# Altium PCB min_system.PcbDoc
Units mil, origin at the board's own origin, x right, y up, seen from the top; angles counter-clockwise.
Board outline 2100 x 900 mil, 4 copper layers (Top Layer, GND, Power, Bottom Layer), stack 23.756 mil thick; 33 components, 50 nets, 183 pads, 137 vias.
Unrouted connection lines stored in the file: 32.
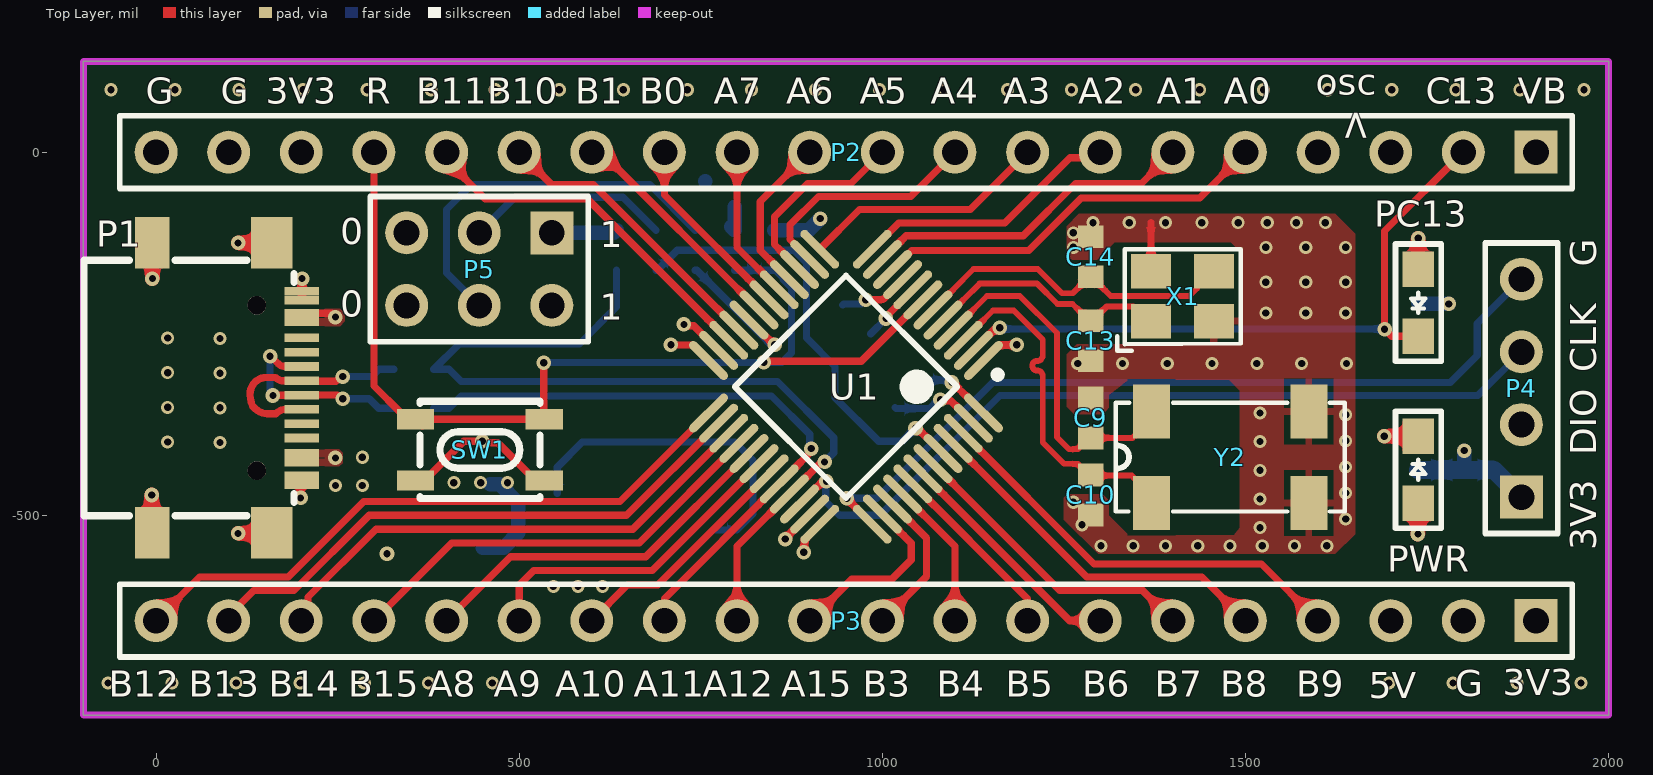
[diagram p0: Top Layer view]
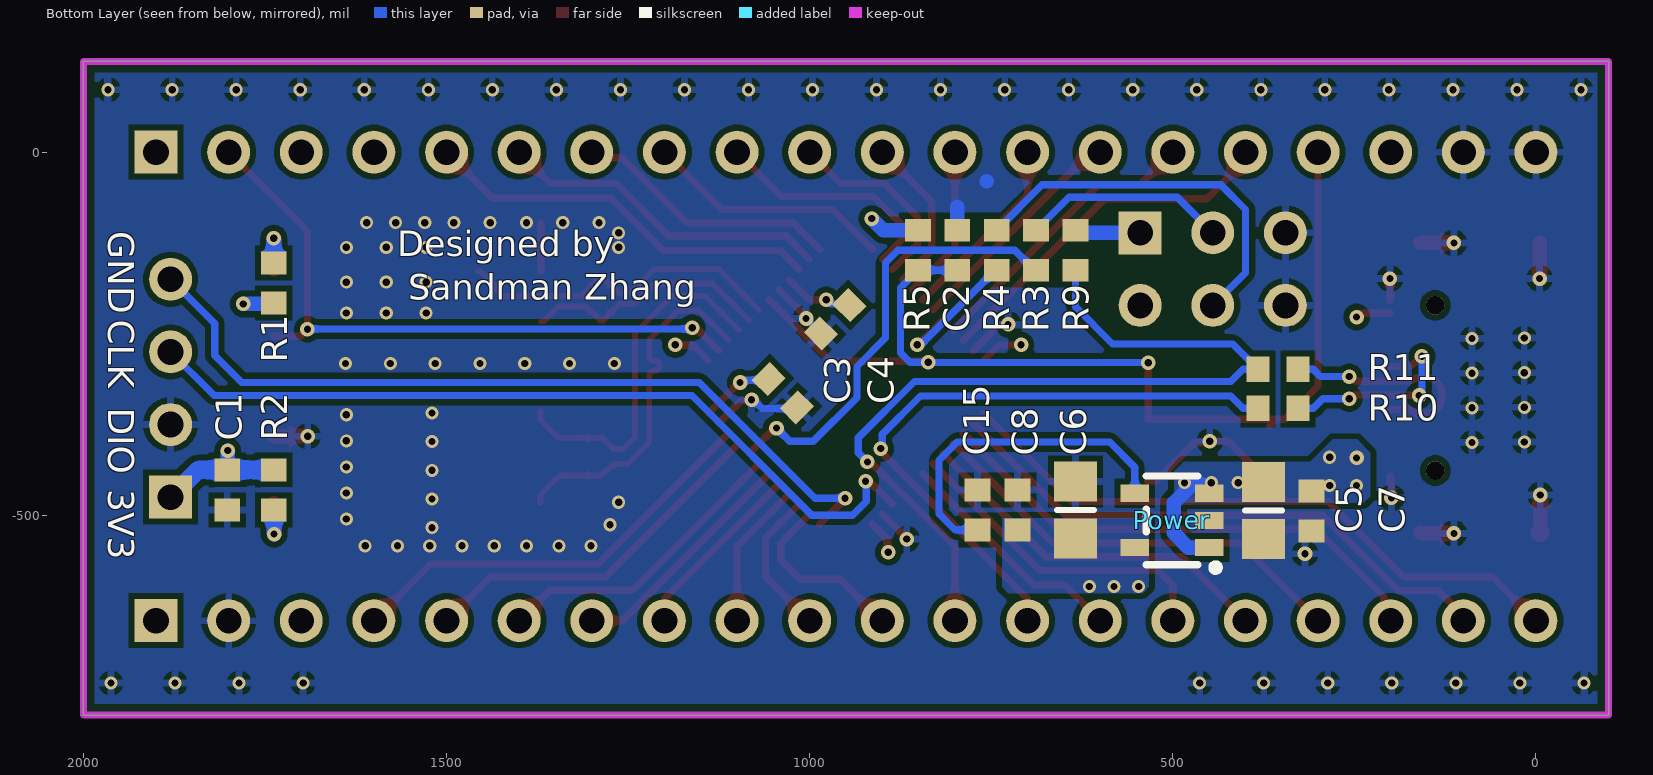
[diagram p1: Bottom Layer view, seen from below]
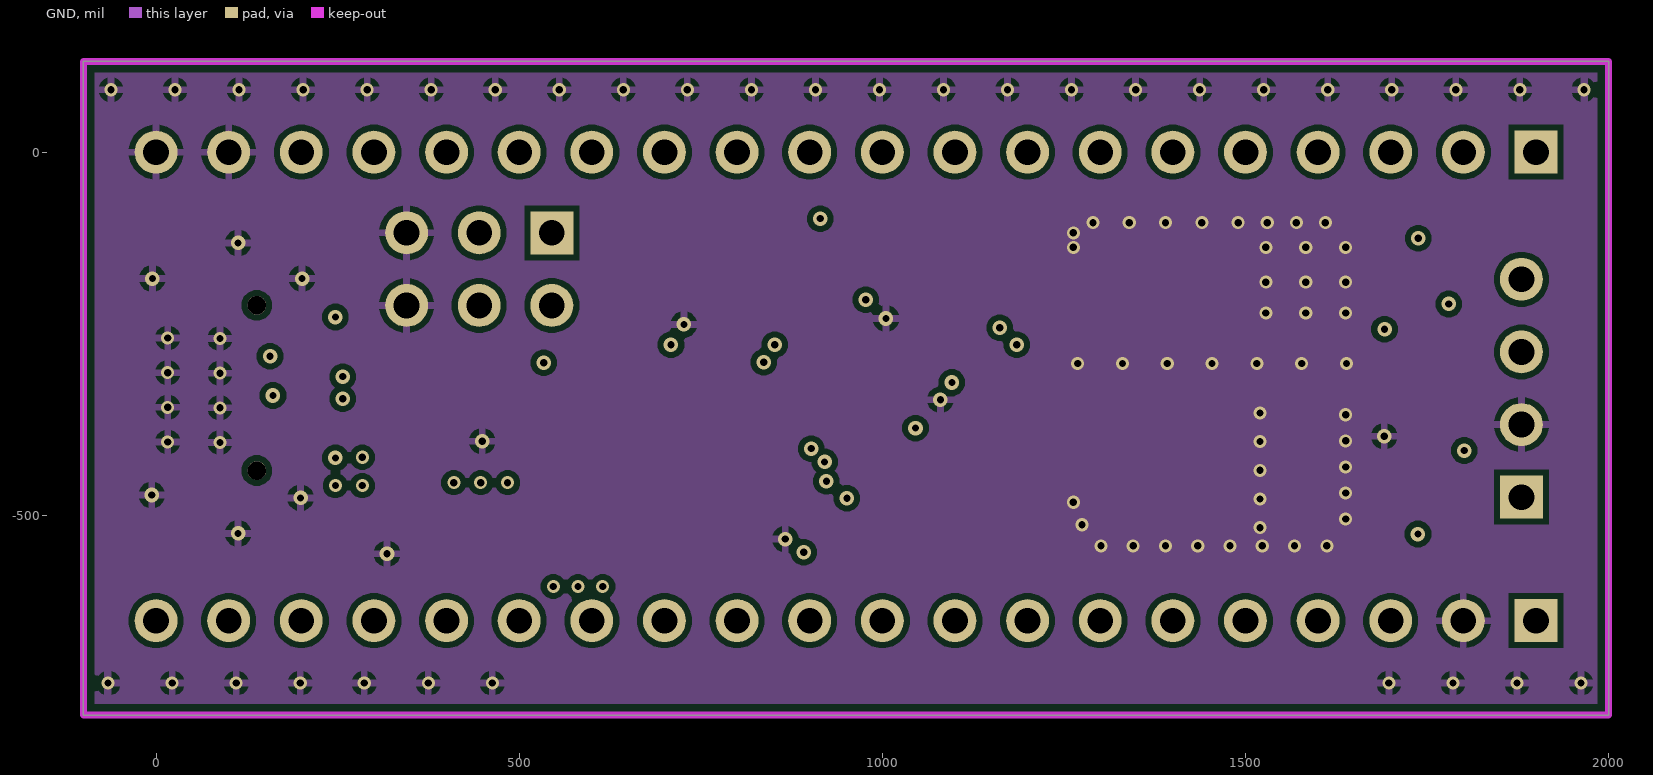
[diagram p2: GND]
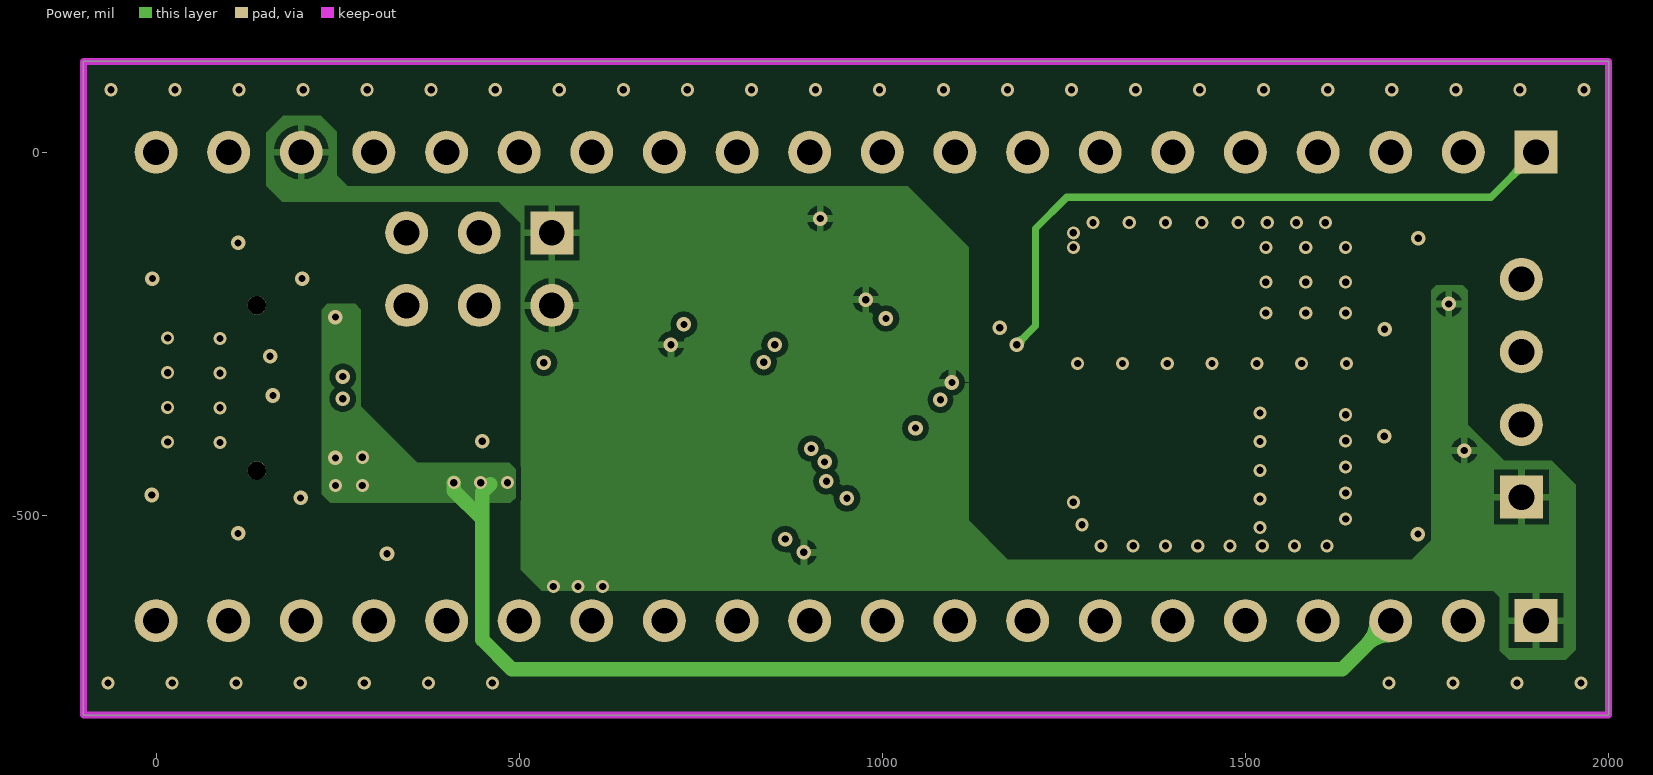
[diagram p3: Power]

## Layer stack, top to bottom
Top Solder: solder mask 0.4, Solder Resist, Dk 3.5
Top Layer: signal copper 1.4
Dielectric 2: prepreg 2.8, PP-006, Dk 4.1
GND: signal copper 1.378
Dielectric 1: dielectric 12.6, FR-4, Dk 4.8
Power: signal copper 1.378
Dielectric 3: prepreg 2.8, PP-006, Dk 4.1
Bottom Layer: signal copper 1.4
Bottom Solder: solder mask 0.4, Solder Resist, Dk 3.5

## Board outline
-100,-775 2000,-775 2000,125 -100,125

## Design rules (kind name [scope] priority, off if disabled: settings)
BoardOutlineClearance [All] p1: gap=15 ignorepadtopadclearanceinfootprint=FALSE
Clearance [All] p1: gap=8 ignorepadtopadclearanceinfootprint=TRUE
ComponentOrientations [All] p1: allowedrotations=1
DiffPairsRouting [All] p1: maxlimit=20 minlimit=8 mostfreqgap=10 toplayer_minwidth=6 toplayer_maxwidth=20 toplayer_prefwidth=10 midlayer1_maxgap=10 midlayer1_minwidth=6 midlayer1_maxwidth=20 midlayer1_prefwidth=10 midlayer2_maxgap=10 midlayer2_minwidth=6 midlayer2_maxwidth=20 midlayer2_prefwidth=10 bottomlayer_maxgap=10 bottomlayer_minwidth=6 bottomlayer_maxwidth=20 bottomlayer_prefwidth=10 maxuncoupledlength=500
HoleSize [All] p1: absolutevalues=TRUE maxlimit=100 minlimit=10 maxpercent=80.000 minpercent=20.000
HoleToHoleClearance [All] p1: gap=8 allowstackedmicrovias=TRUE
MinimumSolderMaskSliver [All] p1: minsoldermaskwidth=8
NetsToIgnore [All] p1:
PermittedLayers [All] p1: toplayerpermitted=TRUE bottomlayerpermitted=TRUE
PlaneConnect PlaneConnect_GND [InNet('GND')] p1: planeconnectstyle=Relief reliefexpansion=20 reliefentries=4 reliefconductorwidth=10 reliefairgap=8
PlaneConnect [All] p2: planeconnectstyle=Direct reliefexpansion=20 reliefentries=4 reliefconductorwidth=15 reliefairgap=10
PolygonConnect PolygonConnect_GND [All] p1: connectstyle=Relief reliefconductorwidth=10 reliefentries=4 polygonreliefangle="90 Angle" airgapwidth=8
PolygonConnect [All] p2: connectstyle=Direct reliefconductorwidth=15 reliefentries=4 polygonreliefangle="90 Angle" airgapwidth=10
RoutingVias [All] p1: holewidth=10 width=20 viastyle="Through Hole" minholewidth=8 minwidth=16 maxholewidth=16 maxwidth=32
SilkToSilkClearance [All] p1: silktosilkclearance=0
SilkToSolderMaskClearance [IsPad] p1: minsilkscreentomaskgap=0 clearancetoexposedcopper=TRUE
SolderMaskExpansion [All] p1: expansion=4 istentingtop=TRUE
UnRoutedNet [All] p1: checkbadconnections=TRUE
Width Width_GND [InNet('GND')] p1: maxlimit=50 minlimit=10 preferedwidth=20
Width Width_5V [InNet('+5')] p2: maxlimit=80 minlimit=10 preferedwidth=20
Width Width_3V3 [InNet('3V3')] p3: maxlimit=80 minlimit=10 preferedwidth=20
Width [All] p4: maxlimit=40 minlimit=8 preferedwidth=10
22 further rules are at their usual default settings.

## Classes and differential pairs
differential pair USBD: +USBD_P -USBD_N
differential pair OSC32: +OSC32_P -OSC32_N
differential pair OSC: +OSC_P -OSC_N
differential pair D: +D_P -D_N

## Components (designator, comment, footprint, x,y, rotation, side; value= is the part's Value field where it differs from the comment)
C1 "100nF" 1608[0603] 1802,-465 r90 bottom value=100pF
C2 "100nF" 1608[0603] 796.75,-135 r270 bottom value=100pF
C3 "100nF" 1608[0603] 1037,-332 r45 bottom value=100pF
C4 "100nF" 1608[0603] 965,-230 r135 bottom value=100pF
C5 "1uF" 6-0805_M 375,-493.37 r90 bottom value=100pF
C6 "1uF" 6-0805_M 634,-492.63 r270 bottom value=100pF
C7 "100nF" 1608[0603] 309,-494 r90 bottom value=100pF
C8 "100nF" 1608[0603] 714,-492.56 r270 bottom value=100pF
C9 "Cap" 1608[0603] 1287,-365.83 r90 top value=100pF
C10 "Cap" 1608[0603] 1287,-472 r90 top value=100pF
C13 "Cap" 1608[0603] 1287,-259.67 r270 top value=100pF
C14 "Cap" 1608[0603] 1287,-144 r270 top value=100pF
C15 "22nF" 1608[0603] 769,-492.56 r90 bottom value=100pF
P1 "USB-C 16P" "USB-C 16P" -5,-125 r270 top locked
P2 "Header 20" HDR1X20 1900,0 r180 top locked
P3 "Header 20" HDR1X20 1900,-645 r180 top locked
P4 "Header 4" HDR1X4 1880,-475 r90 top
P5 "Header 3X2" HDR2X3 545,-111 r180 top
PC13 "LED" LED_0603 1738,-161 r270 top
Power "ME6211" ME6211 501.18,-507 r180 bottom
PWR "LED" LED_0603 1738,-483.52 r90 top
R1 "Res" 1608[0603] 1738,-180 r90 bottom
R2 "Res" 1608[0603] 1738,-465 r270 bottom
R3 "100k" 1608[0603] 688.25,-135 r90 bottom
R4 "100k" 1608[0603] 742.5,-135 r270 bottom
R5 "Res" 1608[0603] 851,-135 r90 bottom
R9 "10K" 1608[0603] 634,-135 r270 bottom
R10 "22R" 1608[0603] 355,-352.67 r0 bottom
R11 "22R" 1608[0603] 355,-299 r0 bottom
SW1 "TS-1089S-AR02516" BUTTON-SMD_4P 446,-410 r0 top
U1 "STM32F103C8T6" STM-LQFP48_N 950,-323 r225 top locked
X1 "XTAL_8MHz" XTAL_3225 1333.61,-264.54 r0 top
Y2 "XTAL_32.768" MC-306 1479,-420 r0 top

## Footprints (in the part's own frame and the unit in brackets; to place one, negate y for a bottom-side part, rotate by r counter-clockwise, add the part's x,y. Pads: shape width x height; smd on the part's side, far side on the other; paste and mask are expansions set on the pad)
6-0805_M [mm] "Chip Resistor, Body 2.0x1.2mm, IPC Low Density"
  rect 1.4x1.5 smd: 1(-1,0) 2(1,0)
  silkscreen extent 0,-0.65 0,0.65, body extent -1.07,-0.7 1.07,0.7, height 0.7
1608[0603] [mm] "Chip Capacitor, Body 1.6x0.8mm, IPC High Density"
  rect 0.8x0.9 smd: 1(-0.7,0) 2(0.7,0)
  body extent -0.87,-0.48 0.87,0.48, height 1.3
BUTTON-SMD_4P [mil] "SMD_4P - L4.2-W3.3-P2.15-LS5.1"
  rect 51.2x27.6 smd mask+2: 1(-88.6,42.3) 2(88.6,42.3) 3(-88.6,-42.3) 4(88.6,-42.3)
  silkscreen extent -83,-67 83,67
HDR1X4 [mm] "Connector; Header; 4 Position"
  rect 1.5x1.5 hole 0.9: 1(0,0)
  round 1.5 hole 0.9: 2(2.54,0) 3(5.08,0) 4(7.62,0)
  silkscreen extent -1.27,-1.27 8.89,1.27
HDR1X20 [mm] "Connector; Header; 20 Position"
  rect 1.5x1.5 hole 0.9: 1(0,0)
  round 1.5 hole 0.9: 2(2.54,0) 3(5.08,0) 4(7.62,0) 5(10.16,0) 6(12.7,0) 7(15.24,0) 8(17.78,0) 9(20.32,0) 10(22.86,0) 11(25.4,0) 12(27.94,0) 13(30.48,0) 14(33.02,0) 15(35.56,0) 16(38.1,0) 17(40.64,0) 18(43.18,0) 19(45.72,0) 20(48.26,0)
  silkscreen extent -1.27,-1.27 49.53,1.27
HDR2X3 [mm] "Connector; Header; 3x2 Position"
  rect 1.5x1.5 hole 0.9: 1(0,0)
  round 1.5 hole 0.9: 2(0,2.54) 3(2.54,0) 4(2.54,2.54) 5(5.08,0) 6(5.08,2.54)
  silkscreen extent -1.27,-1.27 6.35,3.81
LED_0603 [mil]
  rect 49x43 smd: 1(0,0) 2(92.52,0)
  silkscreen extent -34,-31 127,31
MC-306 [mm]
  rect 1.3x1.9 smd: 1(-2.75,-1.6) 2(2.75,-1.6) 3(2.75,1.6) 4(-2.75,1.6)
  silkscreen extent -4,-1.9 4,1.9
ME6211 [mm] "SOT23-5"
  rect 1x0.6 smd: 1(1.3,-0.95) 2(1.3,0) 3(1.3,0.95) 4(-1.3,0.95) 5(-1.3,-0.95)
  silkscreen extent -0.9,-1.78 1.65,1.55
STM-LQFP48_N [mm] "QFP, 48-Leads, Body 7x7mm, Pitch 0.5mm, IPC Medium Density"
  oval 1.8x0.3 smd: 1(-4.05,2.75) 2(-4.05,2.25) 3(-4.05,1.75) 4(-4.05,1.25) 5(-4.05,0.75) 6(-4.05,0.25) 7(-4.05,-0.25) 8(-4.05,-0.75) 9(-4.05,-1.25) 10(-4.05,-1.75) 11(-4.05,-2.25) 12(-4.05,-2.75) 25(4.05,-2.75) 26(4.05,-2.25) 27(4.05,-1.75) 28(4.05,-1.25) 29(4.05,-0.75) 30(4.05,-0.25) 31(4.05,0.25) 32(4.05,0.75) 33(4.05,1.25) 34(4.05,1.75) 35(4.05,2.25) 36(4.05,2.75)
  oval 0.3x1.8 smd: 13(-2.75,-4.05) 14(-2.25,-4.05) 15(-1.75,-4.05) 16(-1.25,-4.05) 17(-0.75,-4.05) 18(-0.25,-4.05) 19(0.25,-4.05) 20(0.75,-4.05) 21(1.25,-4.05) 22(1.75,-4.05) 23(2.25,-4.05) 24(2.75,-4.05) 37(2.75,4.05) 38(2.25,4.05) 39(1.75,4.05) 40(1.25,4.05) 41(0.75,4.05) 42(0.25,4.05) 43(-0.25,4.05) 44(-0.75,4.05) 45(-1.25,4.05) 46(-1.75,4.05) 47(-2.25,4.05) 48(-2.75,4.05)
  silkscreen extent -4.17,-2.75 2.75,3.57, body extent -3.5,-3.5 3.5,3.5, height 1.6
"USB-C 16P" [mm]
  rect 1.8x1.45 smd: 0(0,4.18) 0(10.14,4.18)
  rect 1.8x1.2 smd: 0(0,0) 0(10.14,0)
  rect 0.3x1.2 smd: A1(1.999,5.22) A4(2.761,5.22) A5(3.82,5.22) A6(4.82,5.22) A7(5.32,5.22) A8(6.32,5.22) A9(7.361,5.22) A12(8.149,5.22) B1(8.454,5.22) B4(7.666,5.22) B5(6.82,5.22) B6(5.82,5.22) B7(4.32,5.22) B8(3.32,5.22) B9(2.456,5.22) B12(1.694,5.22)
  round 0.65 hole 0.65 unplated: ""(2.18,3.65) ""(7.96,3.65)
  silkscreen extent 0.6,-2.4 9.54,4.95
XTAL_3225 [mm]
  rect 1.4x1.2 smd mask+0.051: 1(0.929,0.804) 2(3.13,0.804) 3(3.13,2.554) 4(0.929,2.554)
  silkscreen extent -0.26,-0.23 4.06,3.33, body extent 0,0 4.06,3.3, height 0.7

## Part data
C1 C2 C3 C4 C5 C6 C7 C8 C15: library part Cap, "Capacitor", LatestRevisionDate=17-Jul-2002, LatestRevisionNote="Re-released for DXP Platform.", PackageDescription="Radial Cap, Thru-Hole; 2 Leads; 0.3 in Pin Spacing", PackageReference=RAD-0.3, Published=8-Jun-2000, Publisher="Altium Limited"
C9 C10 C13 C14: "Capacitor", LatestRevisionDate=17-Jul-2002, LatestRevisionNote="Re-released for DXP Platform.", PackageDescription="Radial Cap, Thru-Hole; 2 Leads; 0.3 in Pin Spacing", PackageReference=RAD-0.3, Published=8-Jun-2000, Publisher="Altium Limited"
P2 P3: "Header, 20-Pin", LatestRevisionDate=17-Jul-2002, LatestRevisionNote="Re-released for DXP Platform.", Publisher="Altium Limited"
P4: "Header, 4-Pin", LatestRevisionDate=17-Jul-2002, LatestRevisionNote="Re-released for DXP Platform.", Publisher="Altium Limited"
P5: "Header, 3-Pin, Dual row", LatestRevisionDate=17-Jul-2002, LatestRevisionNote="Re-released for DXP Platform.", Publisher="Altium Limited"
PC13 PWR: "Typical INFRARED GaAs LED", LatestRevisionDate=08-Jul-2005, LatestRevisionNote="Mech Layer 1 removed.", PackageDescription="LED; 2 Leads", PackageReference=LED-0, Published=8-Jun-2000, Publisher="Altium Limited"
Power: "SOT23-5"
R1 R2 R5: "Resistor", LatestRevisionDate=17-Jul-2002, LatestRevisionNote="Re-released for DXP Platform.", PackageDescription="Axial Device, Thru-Hole; 2 Leads; 0.4 in Pin Spacing", PackageReference=AXIAL-0.4, Published=8-Jun-2000, Publisher="Altium Limited"
R3 R4 R9 R10 R11: library part Res, "Resistor", LatestRevisionDate=17-Jul-2002, LatestRevisionNote="Re-released for DXP Platform.", PackageDescription="Axial Device, Thru-Hole; 2 Leads; 0.4 in Pin Spacing", PackageReference=AXIAL-0.4, Published=8-Jun-2000, Publisher="Altium Limited"
SW1: library part Button-SMD_4P, "SMD_4P-L4.2-W3.3-P2.15-LS5.1", Actuator/Cap Color=白色, Contact Current=50mA, Insulation Resistance=100MΩ, JLCPCB Part Class="Extended Part", LCSC Part Name="3×4×2.5 160gf 轻触开关", Manufacturer=XUNPU(讯普), Operating Force=160gf@±50gf, Operating Temperature=-30℃~+80℃, Voltage Rating (DC)=12V, Actuator Style=椭圆形按钮, Add into BOM=yes, Circuit=单刀单掷, Convert to PCB=yes, Datasheet=https://atta.szlcsc.com/upload/public/pdf/source/20200810/C720479_389650BB8B865DD3822BD59B78D6CF64.pdf, Device=TS-1089S-AR02516, Manufacturer Part=TS-1089S-AR02516, Mechanical Life=100000, Mounting Style=立贴, Name=TS-1089S-AR02516, Pin Style=SMD接片, Strike Gundam=否, Supplier=LCSC, Supplier Footprint=SMD, Supplier Part=C720479, Switch Height=2.5mm, Switch Length=4.2mm, Switch Width=3.25mm, Symbol=TS-1089S-AR02516
U1: "ARM Cortex-M3 32-bit MCU, 64 KB Flash, 20 KB Internal RAM, 37 I/Os, 48-pin LQFP, -40 to 85 degC, Tray", I/Os (High Current)=37, Operating Frequency(F) (Processor speed) (MHz)=72, Supplier Part Number 1=497-6063-ND, Supply Voltage(Vcc) min (V)=2, A/D Converter="2x12-bit (10 Channel)", ComponentLink1Description="Manufacturer URL", ComponentLink1URL=http://www.st.com/web/en/home.html, ComponentLink2Description=Datasheet, ComponentLink2URL=http://www.st.com/st-web-ui/static/active/en/resource/technical/document/datasheet/CD00161566.pdf, ComponentLink3Description="Package Specification", ComponentLink3URL=http://www.st.com/st-web-ui/static/active/en/resource/technical/document/datasheet/DM00058181.pdf, Core="ARM Cortex-M3", DatasheetVersion="Rev. 16", FLASH Size (Prog) (kB)=64, Internal RAM Size (kB)=20, Mounting Technology="Surface Mount", PackageDescription="48-Pin Low Profile Quad Flat Package, 7 x 7 mm Body, 0.5 mm Pitch", PackageReference=LQFP48, PackageVersion="Rev. 6, 06/2013", Packing=Tray, PartNumber=STM32F103C8T6, Supplier 1=Digi-Key, Supplier 2=Farnell, Supplier 3=Newark, Supplier 4=Newark, Supplier 5=Mouser, Supplier Part Number 2=1447637, Supplier Part Number 3=59M2182, Supplier Part Number 4=57P1222, Supplier Part Number 5=511-STM32F103C8T6
X1: library part XTAL_3225
Y2: "32.768kHz", LatestRevisionDate=17-Jul-2002, LatestRevisionNote="Re-released for DXP Platform.", PackageDescription="Crystal, Thru-Hole; 2 Leads; Body 3.1 x 8.2 mm (Dia.xH)", PackageReference=R38, Published=8-Jun-2000, Publisher="Altium Limited"

## Via types
v1: diameter 18, hole 10, Top Layer to Bottom Layer, tented both sides, 98 vias
v2: diameter 20, hole 10, Top Layer to Bottom Layer, tented both sides, 39 vias

## Nets (pads, with @x,y where several pads share a name; then routed paths per layer and width w, separated by ;. In a path a pad name is that pad's centre, name@x,y a point inside that pad or via, vN(x,y) a via of type N, cw(c..) or ccw(c..) an arc to the next point about the centre after c; other vN are vias at no path point)
3V3: C1.2 C3.2 C4.2 C6.2 C8.2 P2.18 P3.1 P4.1 P5.1 P5.2 Power.5 R1.1 R2.1 R5.2 R9.1 U1.9 U1.24 U1.36 U1.48 | length 695.2
  Top Layer w10: v2(709,-265) 709.58,-265.58 739.47,-265.58 U1.24 ; v2(892,-551) 892.58,-550.42 892.58,-533.53 U1.36 ; v2(977.29,-203) 998.17,-203 ccw(c998.17,-196.17) 1002.99,-201.01 1027.53,-176.47 ccw(c1026.5,-175.45) U1.9 ; v2(1095.82,-317.1) 1096.73,-317.1 1138.81,-359.19 U1.48
  Bottom Layer w10: C4.2 946.9,-209.12 971.17,-209.12 v2(977.29,-203) ; C3.2 1057.88,-313.9 1089.91,-313.9 1093.11,-317.1 v2(1095.82,-317.1)
  Bottom Layer w20: P5.1 630.44,-111 R9.1 ; R5.2 898.44,-107.44 v2(914.44,-91.44) ; R1.1 1739.44,-209 v2(1780,-209) ; v2(1801.41,-410.79) 1801.41,-431.69 1802,-432.28 C1.2
  Bottom Layer w25: R2.1 C1.2 1842.44,-437.44 P4.1
  other v1: 547,-598 581,-598 615,-598
+5: C5.2 C7.2 P1.A4 P1.A9 P1.B4 P1.B9 P3.3 Power.1 Power.3 | length 1777.3
  Top Layer w10: P1.B9 241.71,-221.71 v2(247,-227)
  Power w20: v1(410,-455) 410,-466 449,-505 ; 460,-457 449,-468 449,-505 ; P3.3 1633,-712 490,-712 449,-671 449,-505
  Bottom Layer w20: Power.1 478.6,-544.4 499,-524 499,-483 473,-457 460,-457
  other v1: 247,-459 284,-459 447,-455 484,-455 284,-420
  other v2: 247,-421
BOOT0: R3.1 U1.44 | length 623.5
  Top Layer w10: v2(1045.68,-379.88) 1048.15,-379.88 1083.14,-414.87 U1.44
  Bottom Layer w10: R3.1 690.22,-162.56 717.78,-135 878.36,-135 895.56,-152.21 895.56,-255.56 935,-295 935,-338 995,-398 1027.56,-398 v2(1045.68,-379.88)
BOOT1: R4.2 U1.20 | length 201.6
  Top Layer w10: U1.20 816.86,-231.13 850.73,-265 v2(852,-265)
  Bottom Layer w10: R4.2 744.47,-162.56 844.99,-263.09 850.09,-263.09 v2(852,-265)
D_N: P3.13 R10.2 U1.32 | length 928.8
  Top Layer w10: P3.13 700,-614.76 U1.32 ; 886.72,-428.04 U1.32 ; v2(902.15,-408.15) 903.27,-409.27 903.27,-411.27 858.13,-456.4 U1.32
  Bottom Layer w10: R10.2 403.31,-352.67 420.14,-335.83 847.55,-335.83 900.23,-388.52 900.23,-406.23 v2(902.15,-408.15)
D_P: P3.12 R9.2 R11.2 U1.33 | length 1237.5
  Top Layer w10: P3.12 800,-542.6 U1.33 872.27,-470.55 917.41,-425.41 919.41,-425.41 v2(920.53,-426.53)
  Bottom Layer w10: R9.2 634,-213 583,-264 417.56,-264 R11.2 403.31,-299 420.14,-315.83 855.83,-315.83 933,-393 933,-413.76 920.53,-426.23 v2(920.53,-426.53)
GND: C1.1 C2.1 C3.1 C4.1 C5.1 C6.1 C7.1 C8.1 C9.2 C10.1 C13.2 C14.1 C15.2 P1.0 P1.A1 P1.A12 P1.B1 P1.B12 P2.19 P2.20 P3.2 P4.2 P5.5 P5.6 Power.2 PWR.2 SW1.3 SW1.4 U1.8 U1.23 U1.35 U1.47 X1.2 X1.4 Y2.2 Y2.3 | length 953.8
  Top Layer w10: v2(199,-476) 199,-459.33 cw(c200.51,-459.33) P1.B1 P1.A12 ; P1.A1 P1.B12 201,-191.71 v2(201,-174) ; SW1.3 369.2,-452.3 423.5,-398 v2(449,-398) 450.91,-399.91 470.41,-399.91 522.8,-452.3 SW1.4 ; v2(726.79,-237.18) 728.7,-239.09 740.33,-239.09 774.13,-272.89 U1.23 ; v2(866.24,-532.71) 866.24,-532.04 U1.35 ; v2(1005,-229) 1005,-226.73 1041.87,-189.86 U1.8 ; v2(1080,-341) 1081.29,-342.29 1094.07,-342.29 1124.49,-372.7 U1.47@1125.38,-372.7 ; 1370,-97 1370,-163.8 X1.4
  Top Layer w20: P1.0@-6,-523.21 v2(-6,-472) ; v2(-5,-174) P1.0@-5,-125 ; v2(113,-525) 158.78,-525 P1.0@159.57,-524.21 ; v2(113,-125) P1.0@159.57,-125 ; v2(1691,-391) PWR.2
  Top Layer w25: P1.0@-6,-523.21 ccw(c-5,-523.21) P1.0@-5,-524.21
  Bottom Layer w10: C4.1@984,-250 v2(1005,-229) ; C3.1 1018.9,-352.88 1065.41,-352.88 1077.29,-341 v2(1080,-341)
  Bottom Layer w20: C2.1@792.15,-102.84 C2.1 796.75,-75.25 797,-75
  other v1: -66,-731 22.18,-731 110.35,-731 198.52,-731 286.7,-731 374.87,-731 463.05,-731 1697.48,-731 1785.65,-731 1873.83,-731 1962,-731 1301,-542 1345.43,-542 1389.86,-542 1434.29,-542 1478.71,-542 1523.14,-542 1567.57,-542 1612,-542 1520,-517 1275,-513 1638,-505.1 1263,-482 1520,-477.5 1638,-469.2 1520,-438 1638,-433.3 88,-399.72 16,-399 1520,-398.5 1638,-397.4 1638,-361.5 1520,-359 88,-352 16,-351.28 16,-303.55 88,-304.28 1269,-291 1330.67,-291 1392.33,-291 1454,-291 1515.67,-291 1577.33,-291 1639,-291 88,-256.55 16,-255.83 1528,-221.47 1583,-221.47 1638,-221.47 1528,-178.93 1583,-178.93 1638,-178.93 1263,-131 1528,-131 1583,-131 1638,-131 1263,-111 1290,-97 1340,-97 1390,-97 1440,-97 1490,-97 1530,-97 1570,-97 1610,-97 -62,86 26.17,86 114.35,86 202.52,86 290.7,86 378.87,86 467.04,86 555.22,86 643.39,86 731.56,86 819.74,86 907.91,86 996.09,86 1084.26,86 1172.43,86 1260.61,86 1348.78,86 1436.95,86 1525.13,86 1613.3,86 1701.48,86 1789.65,86 1877.82,86 1966,86
  other v2: 318,-553
NetC15_1: C15.1 Power.4 | length 466.5
  Bottom Layer w10: Power.4 552.36,-433.64 587,-399 797,-399 822,-424 822,-498 799.88,-520.12 C15.1
NetP5_3: P5.3 R3.2 | length 282.4
  Bottom Layer w10: P5.3 494,-62 642.81,-62 R3.2
NetP5_4: P5.4 R4.1 | length 533.1
  Bottom Layer w10: P5.4 400,-166 400,-79 434,-45 680.06,-45 R4.1
NetPC13_1: PC13.1 R1.2 | length 76.9
  Top Layer w20: v2(1737.86,-118.32) 1737.86,-160.86 PC13.1
  Bottom Layer w20: v2(1737.86,-118.32) 1737.86,-152.3 R1.2
NetPWR_1: PWR.1 R2.2 | length 75.8
  Top Layer w20: v2(1737.55,-525.74) 1737.55,-483.97 PWR.1
  Bottom Layer w20: v2(1737.55,-525.74) 1737.55,-493.01 R2.2
NRST: C2.2 P2.17 R5.1 SW1.1 SW1.2 U1.7 | length 1447.1
  Top Layer w10: P2.17 300,-321.81 336.8,-358.61 336.8,-358.9 345.6,-367.7 SW1.1 ; SW1.1@366.61,-376.91 SW1.1 ; v2(534,-290) 534,-367.1 SW1.2 SW1.1 ; v2(836.57,-289.33) 837.9,-288 971.08,-288 U1.7
  Bottom Layer w10: v2(534,-290) 534.33,-289.67 836.24,-289.67 v2(836.57,-289.33) 861.84,-289.33 875,-276.17 875,-186.56 863.72,-175.28 863.72,-173.31 852.97,-162.56 C2.2
OSC32_N: C9.1 U1.4 Y2.4 | length 492.5
  Top Layer w8: U1.4@1097.32,-244.83 1144.15,-198 1189.28,-198 1240.36,-249.07 1240.36,-392.36 1256.92,-408.92 1269.51,-408.92 1285.03,-393.39 1344.46,-393.39 1347.44,-390.41 1349.14,-390.41 1370.73,-368.82 Y2.4
OSC32_P: C10.2 U1.3 Y2.1 | length 492.5
  Top Layer w8: U1.3 1152.44,-218 1181,-218 1221,-258 1221,-262.52 1221,-279.52 cw(c1213,-279.52) 1213,-287.52 ; 1212.96,-300.52 cw(c1212.96,-294.02) 1212.96,-287.52 ; 1213,-300.52 cw(c1213,-308.52) 1221,-308.52 1221,-368.64 1221,-399.64 1250.27,-428.92 1269.51,-428.92 1279.56,-438.97 1281.53,-438.97 1287.8,-445.24 1343.38,-445.24 1347.73,-449.59 1349.14,-449.59 1370.73,-471.18 Y2.1
OSC_N: C14.2 U1.6 X1.3 | length 461.7
  Top Layer w8: U1.6 1098.3,-188.62 1098.3,-188.4 1125.71,-160.99 1213.99,-160.99 1247.27,-194.27 1262.32,-194.27 1285.03,-171.56 1288.97,-171.56 1300.72,-183.31 1300.72,-184.32 1314.4,-198 1422.82,-198 1433.26,-187.56 1433.26,-183.62 1452.89,-164 X1.3
OSC_P: C13.1 U1.5 X1.1 | length 347.2
  Top Layer w8: U1.5 1112.22,-202.54 1112.44,-202.54 1133.99,-180.99 1213.17,-180.99 1241.18,-209 1261.92,-209 1285.03,-232.11 C13.1@1288.97,-232.11 ; C13.1 1298.75,-220.36 1300.85,-220.36 1308.88,-212.33 1345.69,-212.33 1366.27,-232.9 X1.1
PA0: P2.5 U1.10 | length 552.9
  Top Layer w10: U1.10 1014.52,-161.53 1040.65,-135.4 1201.6,-135.4 1274,-63 1437,-63 P2.5
PA1: P2.6 U1.11 | length 461
  Top Layer w10: U1.11 1032.75,-115 1194,-115 1266,-43 1357,-43 P2.6
PA2: P2.7 U1.12 | length 369.2
  Top Layer w10: U1.12 1022.46,-97.43 1168.57,-97.43 1258.51,-7.49 1292.51,-7.49 P2.7
PA3: P2.8 U1.13 | length 341.6
  Top Layer w10: U1.13 968.51,-79 1121,-79 P2.8
PA4: P2.9 U1.14 | length 327.2
  Top Layer w10: U1.14 899.89,-147.13 873,-120.23 873,-100 912,-61 1039,-61 P2.9
PA5: P2.10 U1.15 | length 272.2
  Top Layer w10: U1.15 851.56,-127.12 851.56,-88.82 897.37,-43 957,-43 P2.10
PA6: P2.11 U1.16 | length 220.2
  Top Layer w10: U1.16 832,-135.4 832,-68 P2.11
PA7: P2.12 U1.17 | length 213.5
  Top Layer w10: P2.12 800,-131.24 U1.17
PA8: P3.16 U1.29 | length 511.7
  Top Layer w10: P3.16 488,-557 674.24,-557 U1.29
PA9: P3.15 U1.30 | length 448.6
  Top Layer w10: P3.15 500,-596 520,-576 683.08,-576 U1.30
PA10: P3.14 U1.31 | length 328
  Top Layer w10: P3.14 649,-596 690.92,-596 U1.31
PA15: P3.11 U1.38 | length 253.9
  Top Layer w10: P3.11 901,-645 958,-588 1013,-588 1040,-561 1040,-538.27 U1.38
PB0: P2.13 U1.18 | length 263
  Top Layer w10: P2.13 700,-59.08 U1.18
PB1: P2.14 U1.19 | length 320.3
  Top Layer w10: P2.14 613.08,0 U1.19
PB3: P3.10 U1.39 | length 205.3
  Top Layer w10: P3.10 1061,-584 1061,-531.44 U1.39
PB4: P3.9 U1.40 | length 204.3
  Top Layer w10: U1.40 1100,-542.6 P3.9
PB5: P3.8 U1.41 | length 253.9
  Top Layer w10: U1.41 1200,-614.76 P3.8
PB6: P3.7 U1.42 | length 328
  Top Layer w10: U1.42 1258.08,-645 P3.7
PB7: P3.6 U1.43 | length 419.8
  Top Layer w10: U1.43 1243.92,-603 1358,-603 P3.6
PB8: P3.5 U1.45 | length 503.7
  Top Layer w10: U1.45 1097.55,-401.14 1281.41,-585 1440,-585 P3.5
PB9: P3.4 U1.46 | length 595.4
  Top Layer w10: U1.46 1291.44,-567 1522,-567 P3.4
PB10: P2.15 U1.21 | length 404
  Top Layer w10: P2.15 545,-45 602.4,-45 U1.21
PB11: P2.16 U1.22 | length 502.2
  Top Layer w10: P2.16 400,-11 453,-64 593.56,-64 U1.22
PB12: P3.20 U1.25 | length 879.1
  Top Layer w10: P3.20 60,-585 182,-585 286,-481 638.89,-481 U1.25
PB13: P3.19 U1.26 | length 791.2
  Top Layer w10: P3.19 100,-638.17 134.65,-603.51 190.05,-603.51 293.56,-500 647.73,-500 U1.26
PB14: P3.18 U1.27 | length 708.9
  Top Layer w10: P3.18 209.39,-635.61 209.39,-612.52 302.9,-519 656.56,-519 U1.27
PB15: P3.17 U1.28 | length 603.5
  Top Layer w10: P3.17 407,-538 665.4,-538 U1.28
PC13: P2.2 PC13.2 U1.2 | length 919
  Top Layer w10: U1.2 1125.87,-272.89 1155.14,-243.62 1159.96,-243.62 v2(1161.87,-241.71) ; PC13.2 1701.41,-253.52 v2(1691.53,-243.64) 1691.53,-108.47 P2.2
  Bottom Layer w10: v2(1161.87,-241.71) 1163.73,-243.57 v2(1691.53,-243.64) v2(1691.53,-243.64)
SWCLK: P4.4 U1.37 | length 1129.7
  Top Layer w10: v2(951.25,-476.41) 951.25,-476.89 986.19,-511.82 U1.37
  Bottom Layer w10: v2(951.25,-476.41) 992.59,-476.41 1152,-317 1782,-317 1819,-280 1819,-236 P4.4
SWDIO: P4.3 U1.34 | length 1137.5
  Top Layer w10: U1.34 886.46,-484.47 916.01,-454.91 921.09,-454.91 v2(923,-453)
  Bottom Layer w10: v2(923,-453) 922,-454 922,-480.85 941.15,-500 997,-500 1162,-335 1820,-335 P4.3
USBD_N: P1.A7 P1.B7 R10.1 | length 278.5
  Top Layer w10: v2(157,-281) cw(c157,-283.41) 158.71,-281.71 168,-291 ccw(c177.85,-281.15) 177.85,-295.08 P1.B7 ; v2(161,-335) 161.28,-334.72 200.24,-334.72 P1.A7 228.32,-334.45 249.38,-334.45 254.29,-339.36 v2(257,-339.36)
  Bottom Layer w10: v2(157,-281) 157,-328.29 161,-332.29 v2(161,-335) ; v2(257,-339.36) 293.39,-339.36 306.69,-352.67 R10.1
USBD_P: P1.A6 P1.B6 R11.1 | length 308.1
  Top Layer w10: P1.B6 179.16,-354.13 ccw(c179.16,-374.16) 165,-360 152.98,-360 cw(c152.98,-337.01) 136.72,-353.27 133.32,-349.86 cw(c167.65,-332.93) 129.39,-334.02 129.39,-333.66 cw(c153.74,-333.66) 136.52,-316.44 cw(c151.43,-331.35) 151.43,-310.26 164.63,-310.26 ccw(c175.5,-299.4) 175.5,-314.76 180.44,-314.76 P1.A6 ; P1.A6@200.99,-315.54 236.15,-315.54 247.75,-315.54 254.29,-309 v2(257,-309)
  Bottom Layer w10: v2(257,-309) 296.69,-309 306.69,-299 R11.1
VBAT: P2.1 U1.1 | length 958
  Top Layer w10: U1.1 1160.53,-265.58 1184.42,-265.58 v2(1185,-265)
  Power w10: v2(1185,-265) 1211,-239 1211,-105 1254,-62 1838,-62 P2.1
pads on no net: P1. P1.A5 P1.A8 P1.B5 P1.B8 P2.3 P2.4

## Polygon pours and split planes (outlines as drawn)
3V3 on Bottom Layer "3V3_L04_P005" (solid, remove dead copper, pour order 5): 533,-598.51 533,-504 735,-504 735,-598.51 726.51,-607 541.49,-607
+5 on Bottom Layer "+5_L04_P001" (solid, remove dead copper, pour order 1): 237.52,-483 228,-473.48 228,-413.91 246.41,-395.5 279.5,-395.5 310.53,-426.53 485.07,-426.53 498,-439.46 498,-473 488,-483
GND on Bottom Layer "GND_L04_P007" (solid, remove dead copper, pour order 7): -100,-775 2000,-775 2000,125 -100,125
+5 on Power "+5_L03_P004" (solid, remove dead copper, pour order 4): 239.8,-483 228,-471.21 228,-216.8 235.8,-209 274,-209 282,-217 282,-350 359.46,-427.46 486,-427.46 495,-436.46 495,-476 488,-483
3V3 on Power "Power-3V3" (solid, remove dead copper, pour order 14): 1850,-613 1850,-686.11 1862.89,-699 1941,-699 1955,-685 1955,-458 1922,-425 1856,-425 1806,-375 1806,-190 1799.05,-183.05 1763.02,-182.98 1756,-190 1756,-534 1729,-561 1173,-561 1119,-507 1119,-131 1035,-47 264,-47 249,-32 249,28 226.73,50.27 175.27,50.27 152.05,27.05 151.89,-45.89 174,-68 472,-68 502,-98 502,-575 531,-604 1841,-604
GND on GND "GND_L02_P000" (solid, remove dead copper, pour order 0): -100,-775 2000,-775 2000,125 -100,125
GND on Top Layer "GND_L01_P011" (solid, remove dead copper, pour order 11): 1311.63,-334.56 1311.63,-352 1304.49,-361.08 1264.22,-361.08 1253.84,-350.42 1253.84,-278.16 1267.48,-264.52 1420,-264.52 1420,-214.67 1435.86,-198.81 1492.4,-198.29 1492.4,-136.65 1479.52,-123.78 1320.22,-123.78 1294.2,-149.8 1260.8,-149.8 1253.84,-142.84 1253.84,-101.16 1270,-85 1623.71,-85 1651,-112.29 1651,-525.71 1623.71,-553 1297,-553 1250,-506 1250,-475.63 1254.64,-471 1303.72,-471 1311.63,-478.9 1311.63,-499.58 1339.17,-527.12 1484.12,-527.12 1492.4,-516.77 1492.4,-328.41 1477.19,-313.2 1339.17,-313.2
+5 on Top Layer "+5_L01_P010" (solid, pour order 10): 177,-215.84 177,-239.59 253.41,-239.59 260,-233 260,-222 253.84,-215.84
+5 on Top Layer "+5_L01_P009" (solid, pour order 9): 177,-409 176.94,-409.06 176.94,-432.73 252.27,-432.73 257,-428 257,-414 252,-409

## Keep-outs
Keep-Out Layer:
  lines w10: -100,-775 -100,-725 -100,-325 -100,125 ; -99,-775 1999,-775 ; -99,125 1999,125 ; 2000,-775 2000,125

## Silkscreen, mask and mechanical layers (free items; w line width, h text height)
Top Overlay:
  text "osc" at 1597,79 h36
  text "G" at -14,67 h36
  text "G" at 89,67 h36
  text "3V3" at 151,67 h36
  text "R" at 289,67 h36
  text "B11" at 358,67 h36
  text "B10" at 456,67 h36
  text "B1" at 577,67 h36
  text "B0" at 665,67 h36
  text "A7" at 768,67 h36
  text "A6" at 868,67 h36
  text "A5" at 969,67 h36
  text "A4" at 1067,67 h36
  text "A3" at 1166.43,67 h36
  text "A2" at 1270,67 h36
  text "A1" at 1378,67 h36
  text "A0" at 1470,67 h36
  text "C13" at 1748,67 h36
  text "VB" at 1875,67 h36
  text "<" at 1670,60 h40 r90
  text "G" at 1983,-158 h36 r90
  text "CLK" at 1983,-303 h36 r90
  text "DIO" at 1983,-417 h36 r90
  text "3V3" at 1983,-548 h36 r90
  text "3V3" at 1854,-748 h36
  text "G" at 1789,-749 h36
  text "B12" at -65,-750 h36
  text "B13" at 45,-750 h36
  text "B14" at 155,-750 h36
  text "B15" at 265,-750 h36
  text "A8" at 375,-750 h36
  text "A9" at 465,-750 h36
  text "A10" at 550,-750 h36
  text "A11" at 658,-750 h36
  text "A12" at 753,-750 h36
  text "A15" at 861,-750 h36
  text "B3" at 973,-750 h36
  text "B4" at 1075,-750 h36
  text "B5" at 1170,-750 h36
  text "B6" at 1275,-750 h36
  text "B7" at 1375,-750 h36
  text "B8" at 1465,-750 h36
  text "B9" at 1570,-750 h36
  text "5V" at 1670,-752 h36
Bottom Overlay:
  text "GND" at 1966,-109 h36 r90
  text "Designed by  /  Sandman Zhang" at 1568,-214.69 h60
  text "CLK" at 1966,-231 h36 r90
  text "DIO" at 1966,-352 h36 r90
  text "3V3" at 1966,-464 h36 r90
Mechanical 1:
  the board outline again, w10

## Text inside footprints (layer, text, board x,y; h text height)
P5: Top Overlay "1" at 611,-130.99 h36; Top Overlay "1" at 611,-230.99 h36; Top Overlay "0" at 285,-91 h36 r180; Top Overlay "0" at 285,-191 h36 r180